# EAGLE board master (EAGLE 6.5.0)
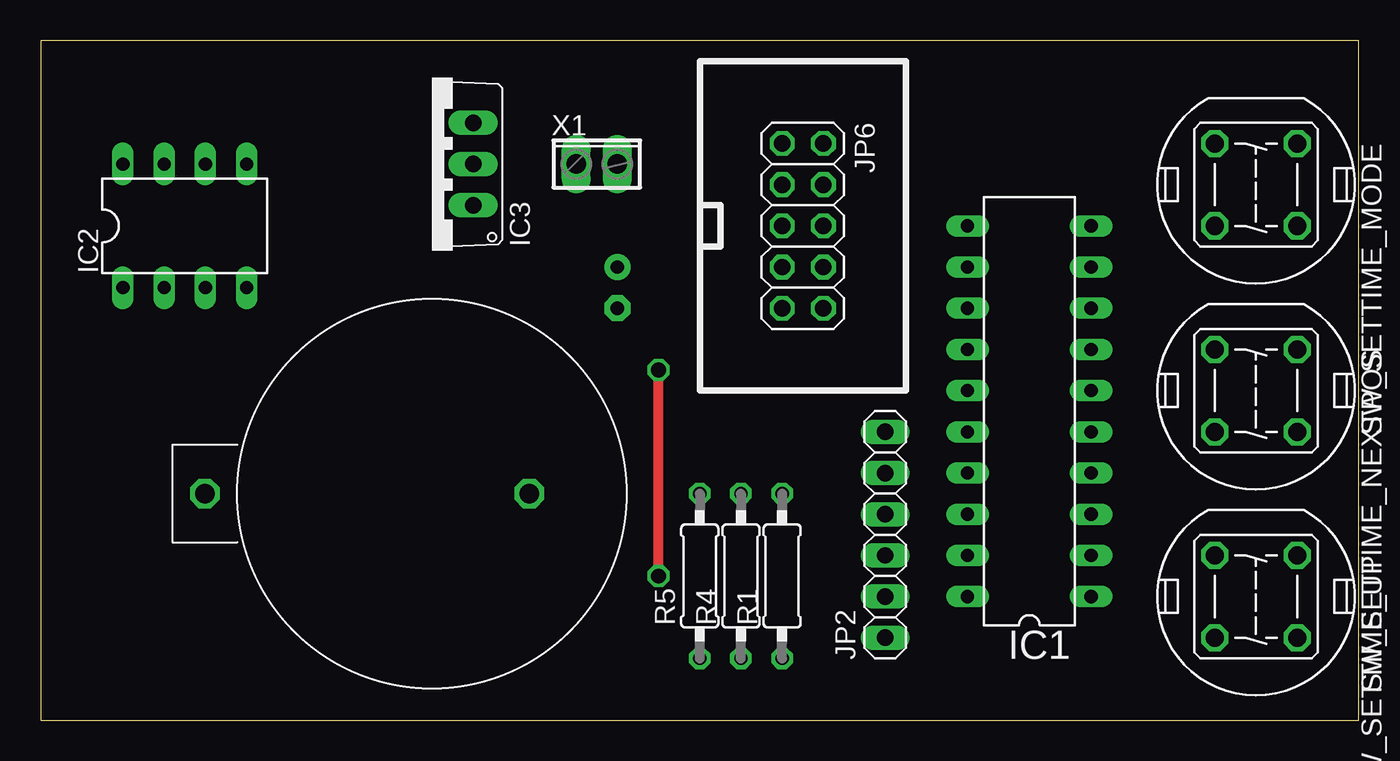
[diagram p0: board, top side]
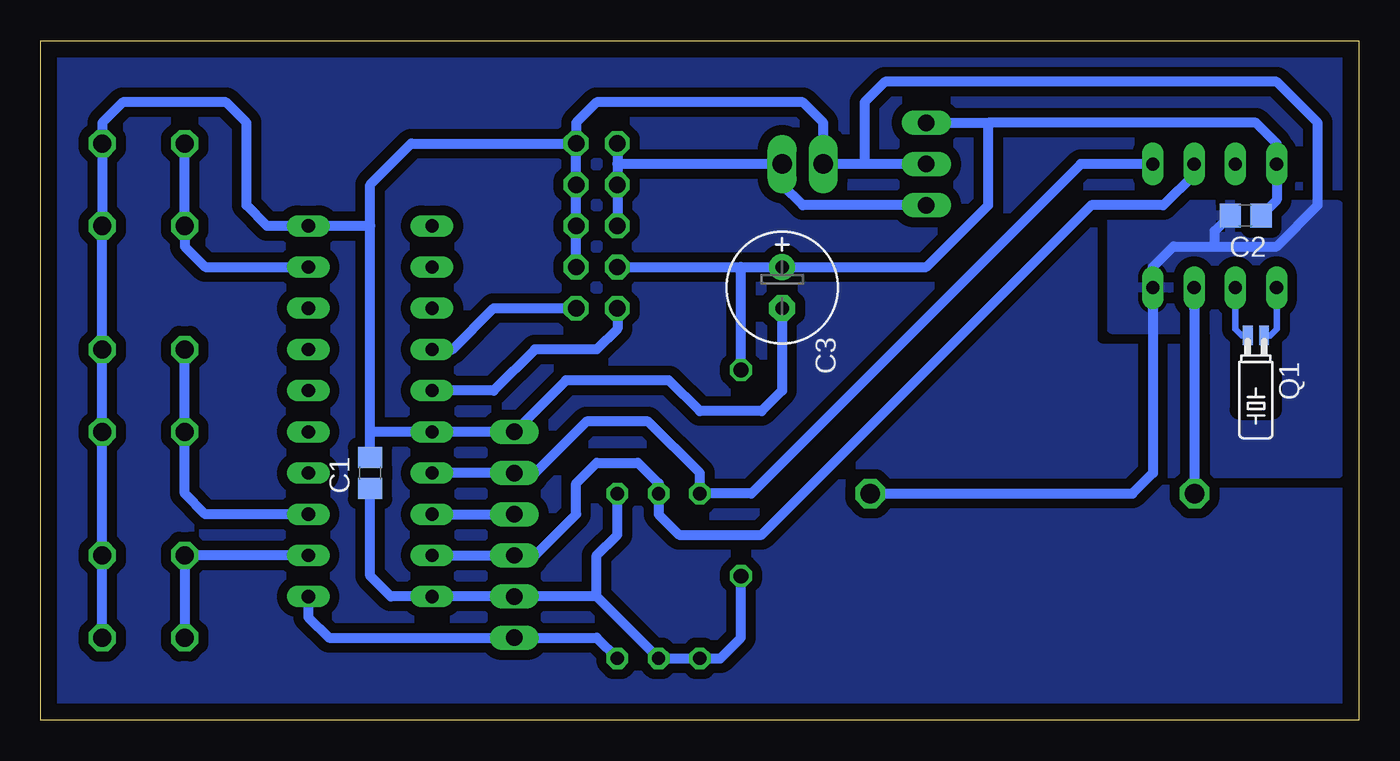
[diagram p1: board, bottom side, seen from below]

Size 81.28 x 41.91 mm. Coordinates in mm from the lower left corner, seen from the top.
Outline: 0,0 81.28,0 81.28,41.91 0,41.91 0,0
Copper layers (1*16): Top 0.035mm / dielectric 1.5mm / Bottom 0.035mm
Design rules "default": minimum track width 10mil, minimum drill 24mil, track to track 8mil, track to pad 8mil, pad to pad 8mil, via to via 8mil, smd to smd 8mil, copper to edge 40mil, drill to drill 8mil, minimum pad ring 10mil, minimum via ring 8mil, stop-mask expansion 4mil, vias tented up to drill 0mil, thermal gap 10mil

## Footprints (pad centres in the part's own frame; a part is rotated, then mirrored left to right if it is on the bottom)
C0805 = smd 1.3 x 1.5: 1 -0.95,0; 2 0.95,0
E2,5-7 = drill 0.813 pad 1.6: + -1.27,0 | drill 0.813 pad 1.6 octagon: - 1.27,0
DIL20 = drill 0.813 long: 1 -11.43,-3.81; 2 -8.89,-3.81; 3 -6.35,-3.81; 4 -3.81,-3.81; 5 -1.27,-3.81; 6 1.27,-3.81; 7 3.81,-3.81; 8 6.35,-3.81; 9 8.89,-3.81; 10 11.43,-3.81; 11 11.43,3.81; 12 8.89,3.81; 13 6.35,3.81; 14 3.81,3.81; 15 1.27,3.81; 16 -1.27,3.81; 17 -3.81,3.81; 18 -6.35,3.81; 19 -8.89,3.81; 20 -11.43,3.81
DIP-8 = drill 0.813 long: 1 -3.81,-3.81; 2 -1.27,-3.81; 3 1.27,-3.81; 4 3.81,-3.81; 5 3.81,3.81; 6 1.27,3.81; 7 -1.27,3.81; 8 -3.81,3.81
TO220V = drill 1.016 long: 1 -2.54,-2.54; 2 0,-2.54; 3 2.54,-2.54
1X06 = drill 1.016 long: 1 -6.35,0; 2 -3.81,0; 3 -1.27,0; 4 1.27,0; 5 3.81,0; 6 6.35,0
2X05 = drill 1.016 octagon: 1 -5.08,-1.27; 2 -5.08,1.27; 3 -2.54,-1.27; 4 -2.54,1.27; 5 0,-1.27; 6 0,1.27; 7 2.54,-1.27; 8 2.54,1.27; 9 5.08,-1.27; 10 5.08,1.27
Q-SMD-1MM = smd 0.6 x 1.2: 1 -0.5,0.4; 2 0.5,0.4
0207/10 = drill 0.813 octagon: 1 -5.08,0; 2 5.08,0
DTE6 = drill 1.118 octagon: 1 -2.54,2.54; 2 2.54,2.54; 3 2.54,-2.54; 4 -2.54,-2.54
BATT = drill 1.2 octagon: NEG 0,6; POS 0,-14
2POL254 = drill 1.2 long: 1 -1.27,0; 2 1.27,0

## Placement (x,y rotation side)
C1  100nF  [C0805]  60.96,15.24 90 bottom
C2  100nF  [C0805]  6.98,31.11 180 bottom
C3  100nF  [E2,5-7]  35.56,26.67 270 bottom
IC1  AT90S2313P  [DIL20]  60.96,19.05 90 top
IC2  DS1307  [DIP-8]  8.89,30.48 0 top
IC3  7805TV  [TO220V]  24.13,34.29 90 top
JP2  [1X06]  52.07,11.43 90 top
JP6  [2X05]  46.99,30.48 270 top
Q1  [Q-SMD-1MM]  6.35,24.13 180 bottom
R1  ~ 4.7k  [0207/10]  45.72,8.89 90 top
R4  10k  [0207/10]  43.18,8.89 90 top
R5  10k  [0207/10]  40.64,8.89 90 top
SW_SETTIME_MODE  DTE6  [DTE6]  74.93,33.02 270 top
SW_SETTIME_NEXTPOS  DTE6  [DTE6]  74.93,20.32 270 top
SW_SETTIME_UP  DTE6  [DTE6]  74.93,7.62 270 top
U$1  BATT  [BATT]  24.13,13.97 270 top
X1  [2POL254]  34.29,34.29 0 top

## Library data of the parts
C1-C3 R1 R4 R5 = rcl
IC1 = atmel; OC_FARNELL: unknown; OC_NEWARK: unknown
IC2 = DS1307
IC3 = linear
JP2 JP6 = pinhead
Q1 = smd-crystal; OC_FARNELL: unknown; OC_NEWARK: unknown
SW_SETTIME_MODE SW_SETTIME_NEXTPOS SW_SETTIME_UP = switch-misc
U$1 = batteryholder
X1 = con-phoenix-254; OC_FARNELL: unknown; OC_NEWARK: unknown

## Nets
+5V: C1.1 C2.1 C3.+ IC1.20 IC2.8 IC3.3 JP2.2 JP6.7 R1.2 R4.1 R5.1
+15V: IC3.1 JP6.1 JP6.3 JP6.5 X1.2
D_SCL: IC1.15 JP6.9
D_SDA: IC1.14 JP6.10
GND: C1.2 C2.2 C3.- IC1.10 IC2.4 IC3.2 JP2.6 JP6.2 JP6.4 JP6.6 JP6.8 SW_SETTIME_MODE.1 SW_SETTIME_MODE.2 SW_SETTIME_NEXTPOS.1 SW_SETTIME_NEXTPOS.2 SW_SETTIME_UP.1 SW_SETTIME_UP.2 U$1.NEG X1.1
N$2: IC2.1 Q1.1
N$3: IC2.2 Q1.2
PGM01: IC1.18 JP2.4
RESET: IC1.1 JP2.1 R1.1
SCL: IC1.19 IC2.6 JP2.3 R4.2
SDA: IC1.17 IC2.5 JP2.5 R5.2
SI_SETTIME_MODE: IC1.9 SW_SETTIME_MODE.3 SW_SETTIME_MODE.4
SI_SETTIME_NEXTPOS: IC1.3 SW_SETTIME_NEXTPOS.3 SW_SETTIME_NEXTPOS.4
SI_SETTIME_UP: IC1.2 SW_SETTIME_UP.3 SW_SETTIME_UP.4
VBAT: IC2.3 U$1.POS

## Tracks (layer width: path | path; a pad name or v marks a point on that pad's centre or on a via)
+5V  (via drill 0.9)
  Top 0.61: v38.1,8.89 v38.1,21.59
  Bottom 0.61: IC3.3 22.86,36.83 | JP6.7 38.1,27.94 | 22.86,36.83 22.86,31.75 26.67,27.94 C3.+ 38.1,27.94 | 22.86,36.83 6.35,36.83 5.08,35.56 IC2.8 5.08,32.07 C2.1 | 46.99,7.62 R4.1 R5.1 39.37,3.81 38.1,5.08 v38.1,8.89 | 46.99,7.62 JP2.2 IC1.20 59.69,7.62 60.96,8.89 C1.1 | v38.1,21.59 38.1,27.94 | 46.99,7.62 46.99,10.16 45.72,11.43 R1.2
+15V
  Bottom 0.61: JP6.1 45.72,34.29 | 45.72,34.29 JP6.3 JP6.5 | IC3.1 34.29,31.75 35.56,33.02 X1.2 45.72,34.29
D_SCL
  Bottom 0.61: JP6.9 45.72,24.13 46.99,22.86 50.8,22.86 53.34,20.32 IC1.15
D_SDA
  Bottom 0.61: IC1.14 55.88,22.86 53.34,25.4 JP6.10
FILL
  pour Bottom (isolate 0.61, rank 3): 0,0 0,41.91 81.28,41.91 81.28,0
GND
  Bottom 0.61: JP6.2 JP6.4 JP6.6 JP6.8 | IC3.2 30.48,34.29 | 30.48,34.29 X1.1 33.02,36.83 34.29,38.1 46.99,38.1 48.26,36.83 JP6.2 | 8.89,29.21 11.43,29.21 12.7,27.94 IC2.4 12.7,15.24 13.97,13.97 U$1.NEG | 8.89,29.21 5.08,29.21 2.54,31.75 2.54,36.83 5.08,39.37 29.21,39.37 30.48,38.1 30.48,34.29 | 60.96,17.78 JP2.6 48.9,20.95 42.55,20.95 40.64,19.05 36.83,19.05 35.56,20.32 C3.- | 60.96,17.78 60.96,30.48 | 60.96,30.48 IC1.10 67.31,30.48 68.58,31.75 68.58,36.83 69.85,38.1 76.2,38.1 77.47,36.83 SW_SETTIME_MODE.1 SW_SETTIME_MODE.2 SW_SETTIME_NEXTPOS.1 SW_SETTIME_NEXTPOS.2 SW_SETTIME_UP.1 SW_SETTIME_UP.2 | 60.96,30.48 60.96,33.02 58.42,35.56 JP6.2 | C1.2 60.96,17.78 | 8.89,29.21 8.89,30.16 C2.2
  pour Bottom (isolate 0.61, rank 2): 1.27,31.75 15.24,31.75 15.24,24.13 8.89,24.13 8.89,15.24 1.27,15.24
N$2
  Bottom 0.406: Q1.1 5.48,23.73 5.08,24.13 IC2.1
N$3
  Bottom 0.406: Q1.2 7.22,23.73 7.62,24.13 IC2.2
PGM01
  Bottom 0.61: IC1.18 JP2.4
RESET
  Bottom 0.61: IC1.1 64.77,6.35 63.5,5.08 JP2.1 46.99,5.08 R1.1
SCL
  Bottom 0.61: IC1.19 JP2.3 50.8,10.16 48.26,12.7 48.26,14.61 46.99,15.88 44.45,15.88 43.18,14.61 R4.2 43.18,12.7 41.91,11.43 36.83,11.43 16.51,31.75 12.06,31.75 10.16,33.66 IC2.6
SDA
  Bottom 0.61: IC1.17 JP2.5 50.8,15.24 47.62,18.41 43.82,18.41 40.64,15.24 R5.2 37.47,13.97 17.14,34.29 IC2.5
SI_SETTIME_MODE
  Bottom 0.61: SW_SETTIME_MODE.4 SW_SETTIME_MODE.3 72.39,29.21 71.12,27.94 IC1.9
SI_SETTIME_NEXTPOS
  Bottom 0.61: SW_SETTIME_NEXTPOS.4 SW_SETTIME_NEXTPOS.3 72.39,13.97 71.12,12.7 IC1.3
SI_SETTIME_UP
  Bottom 0.61: SW_SETTIME_UP.3 SW_SETTIME_UP.4 IC1.2
VBAT
  Bottom 0.61: U$1.POS 10.13,25.37 10.16,25.4 IC2.3